# Altium PCB 2layer.PcbDoc (part 1 of 2)
Units mm, origin at the board's own origin, x right, y up, seen from the top; angles counter-clockwise.
Board outline 95.88 x 80.26 mm, 2 copper layers (Top Layer, Bottom Layer); 72 components, 60 nets, 280 pads, 229 vias.
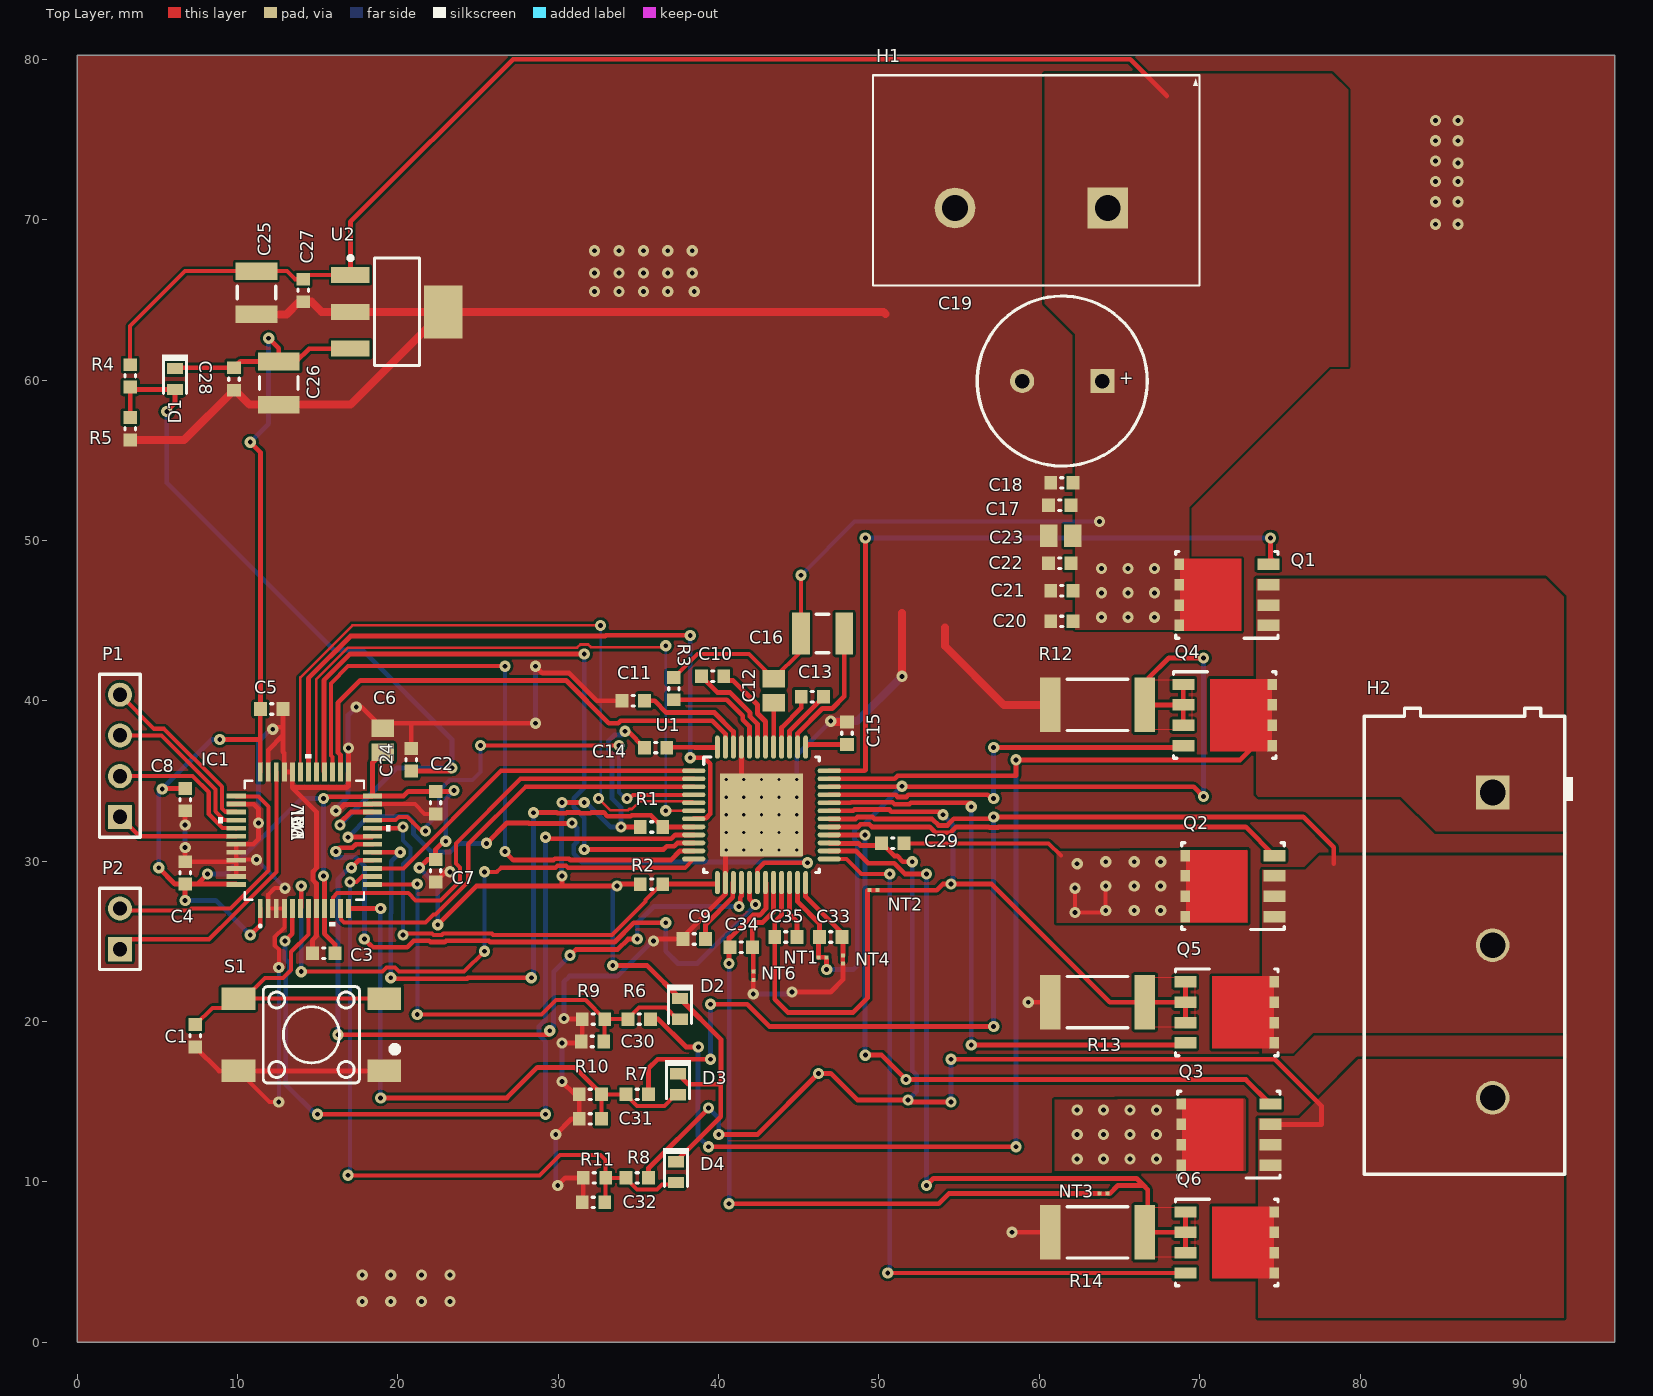
[diagram p0: Top Layer view]
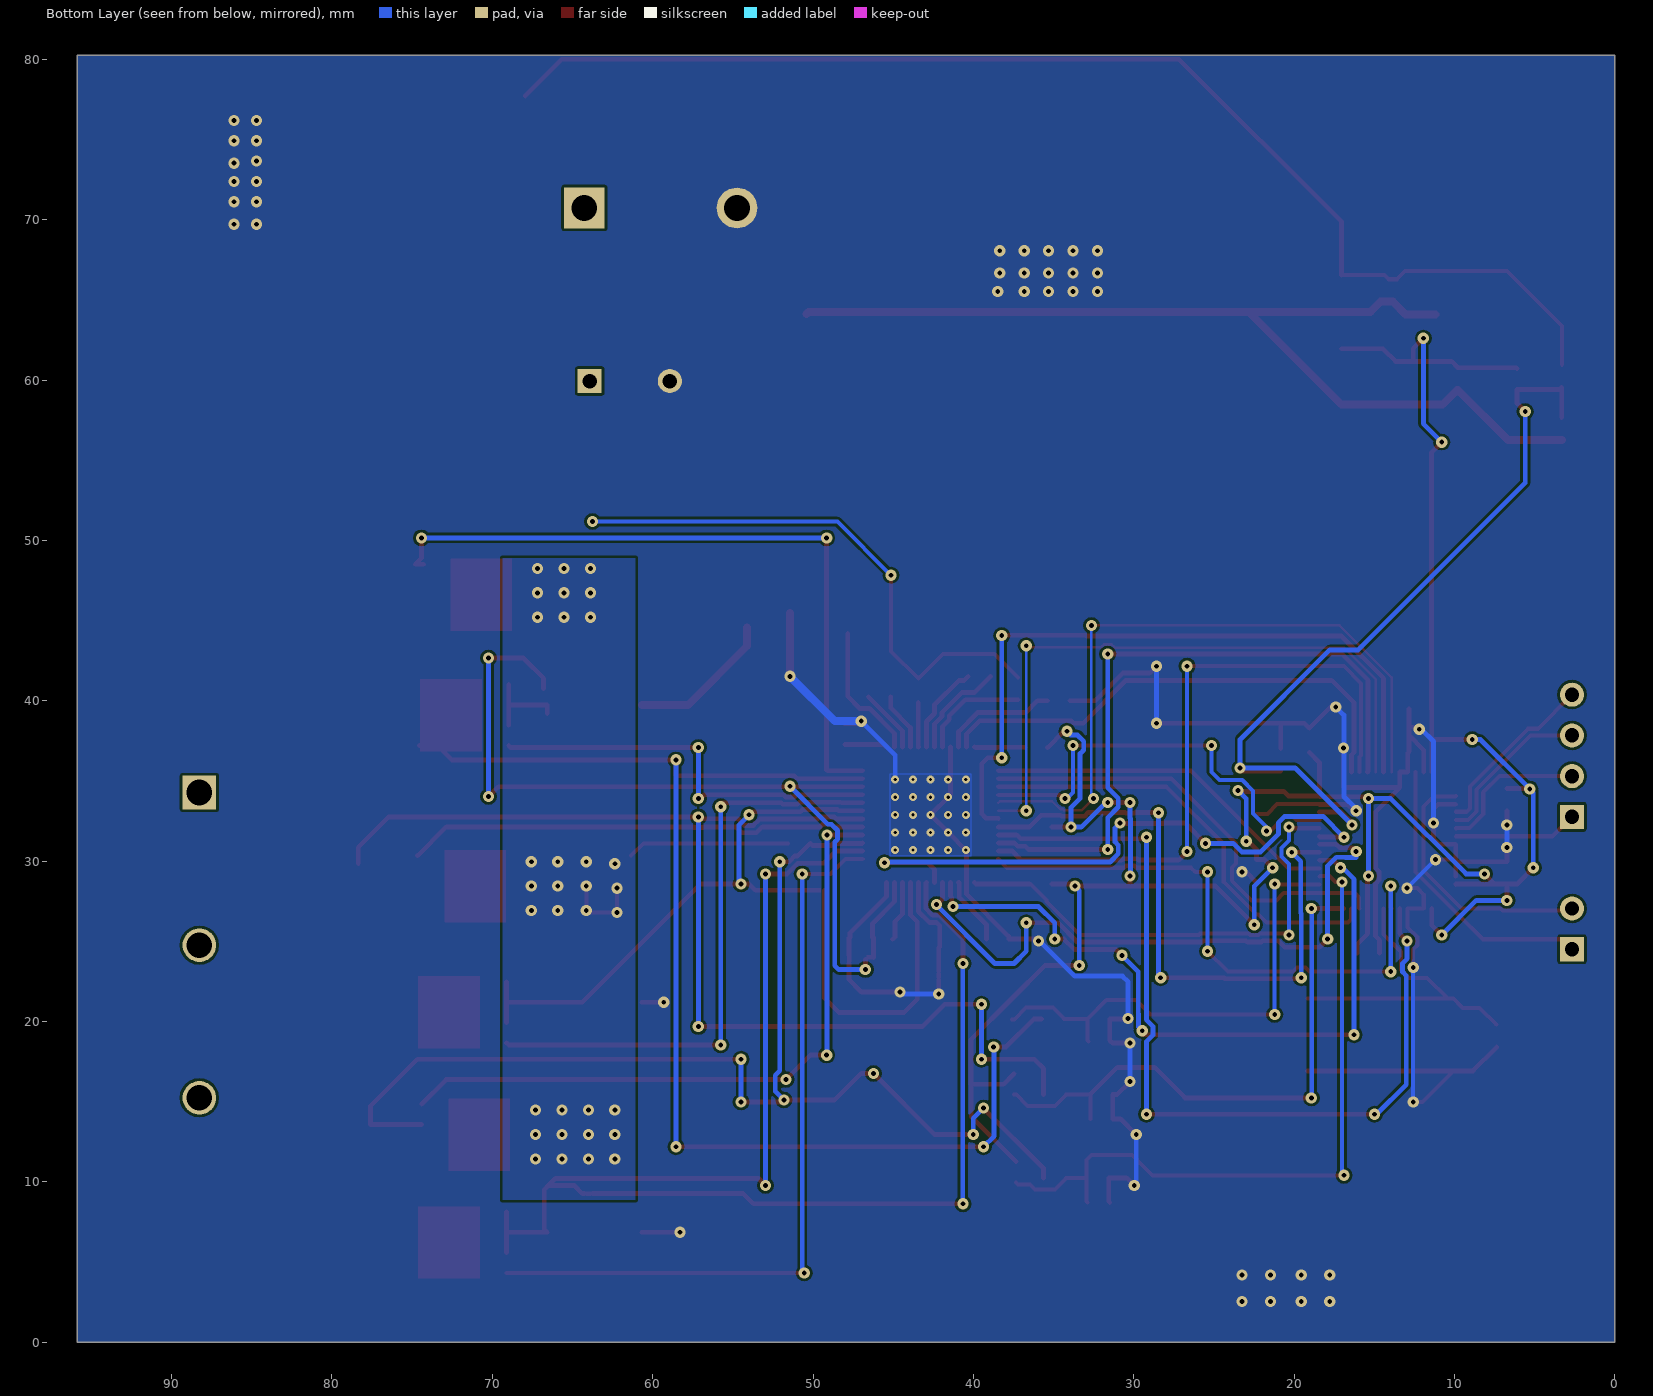
[diagram p1: Bottom Layer view, seen from below]

## Layer stack, top to bottom
Top Solder: solder mask 0.0102, Solder Resist, Dk 3.5
Top Layer: signal copper 0.0356
Dielectric 1: dielectric 0.32, FR-4, Dk 4.8
Bottom Layer: signal copper 0.0356
Bottom Solder: solder mask 0.0102, Solder Resist, Dk 3.5

## Board outline
0,0 95.885,0 95.885,80.264 0,80.264

## Design rules (kind name [scope] priority, off if disabled: settings)
Clearance [All] p1: gap=0.16 ignorepadtopadclearanceinfootprint=FALSE except(0: Arc-Hole Track-Hole SMDPad-Hole THPad-Hole Via-Hole Fill-Hole Poly-Hole Region-Hole Text-Hole)
HoleSize [All] p1: absolutevalues=TRUE maxlimit=2.54 minlimit=0.3 maxpercent=80.000 minpercent=20.000
HoleToHoleClearance [All] p1: gap=0.16 allowstackedmicrovias=TRUE
MinimumSolderMaskSliver [All] p1: minsoldermaskwidth=0.16
PlaneConnect [All] p1: planeconnectstyle=Relief reliefexpansion=0.508 reliefentries=2 reliefconductorwidth=0.254 reliefairgap=0.254
PolygonConnect "Direct Connect" [All] p1: connectstyle=Direct reliefconductorwidth=0.254 reliefentries=4 polygonreliefangle="90 Angle" airgapwidth=0.254
PolygonConnect [All] p2: connectstyle=Relief reliefconductorwidth=0.254 reliefentries=4 polygonreliefangle="90 Angle" airgapwidth=0.254
RoutingVias [All] p1: holewidth=0.3 width=0.7 viastyle="Through Hole" minholewidth=0.3 minwidth=0.5 maxholewidth=0.5 maxwidth=1.27
SilkToSilkClearance [All] p1: silktosilkclearance=0.16
SilkToSolderMaskClearance [IsPad] p1: minsilkscreentomaskgap=0.16 clearancetoexposedcopper=TRUE
SolderMaskExpansion [All] p1: expansion=0.102
UnRoutedNet [All] p1: checkbadconnections=TRUE
UnpouredPolygon [All] p1: allowunpoured=TRUE allowshelved=TRUE
Width [All] p1: maxlimit=11 minlimit=0.16 preferedwidth=0.254
22 further rules are at their usual default settings.

## Classes and differential pairs
component class Designator: C17 C18 C19 C20 C21 C22 C23 C24 C25 C26 C27 C28 D1 H1 R4 R5 U2
component class "Driver Stage": C29 C30 C31 C32 C33 C34 C35 D2 D3 D4 H2 NT1 NT2 NT3 NT4 NT6 Q1 Q2 Q3 Q4 Q5 Q6 R6 R7 R8 R9 R10 R11 R12 R13 R14
component class MCU: C1 C2 C3 C4 C5 C6 C7 C8 IC1 P1 P2 S1

## Components (designator, comment, footprint, x,y, rotation, side; value= is the part's Value field where it differs from the comment)
C1 "C1608X7R1H104K" 0603L 7.366,19.112 r270 top value=0.1uF
C2 "C1608X7R1H104K" 0603L 22.352,33.655 r270 top value=0.1uF
C3 "C1608X7R1H104K" 0603L 15.367,24.257 r180 top value=0.1uF
C4 "C1608X7R1H104K" 0603L 6.731,29.272 r90 top value=0.1uF
C5 "C1608X7R1H104K" 0603L 12.127,39.497 r0 top value=0.1uF
C6 "GRM21BR71A475KA73L" 0805L 19.05,37.539 r90 top value=4.7uF
C7 "C1608X8R1H103K" 0603L 22.352,29.399 r270 top value=0.01uF
C8 "C1608X7R1C105K" 0603L 6.731,33.844 r270 top value=1uF
C9 "C1608X7R1C105K" 0603L 38.481,25.146 r180 top value=1uF
C10 "C1608X7R1H473K" 0603L 39.624,41.529 r180 top value=0.047uF
C11 "C1608X7R1C105K" 0603L 34.671,40.005 r180 top value=1uF
C12 "GRM21BR71A475KA73L" 0805L 43.434,40.64 r90 top value=4.7uF
C13 "C1608X7R1H473K" 0603L 45.847,40.259 r0 top value=0.047uF
C14 "C1608X7R1C105K" 0603L 36.068,37.084 r0 top value=1uF
C15 "C1608X7R1C105K" 0603L 48.006,37.973 r90 top value=1uF
C16 "GRM32ER72A225KA35L" 1210L 46.482,44.196 r180 top value=2.2uF
C17 "C1608X7R1H104K" 0603L 61.279,52.197 r180 top value=0.1uF
C18 "C1608X7R1H103K" 0603L 61.406,53.594 r180 top value=0.01uF
C19 "ECA-1HM471" M_1000x2000 61.428,59.944 r180 top value=470uF
C20 "C1608X7R1H102K" 0603L 61.406,44.958 r180 top value=1000pF
C21 "C1608X7R1H103K" 0603L 61.406,46.863 r180 top value=0.01uF
C22 "C1608X7R1H104K" 0603L 61.279,48.578 r180 top value=0.1uF
C23 "GRM21BR71H105KA12L" 0805L 61.329,50.292 r180 top value=1uF
C24 "C0603C104J4RACTU" 0603L 20.828,36.322 r90 top value=0.1uF
C25 "GRM32ER71H106KA12L" 1210L 11.176,65.452 r270 top value=10uF
C26 "GRM32ER71H106KA12L" 1210L 12.573,59.817 r270 top value=10uF
C27 "C1608X7R1H104K" 0603L 14.097,65.594 r270 top value=0.1uF
C28 "C1608X7R1H104K" 0603L 9.779,60.071 r270 top value=0.1uF
C29 "GRM188R72A182KA01D" 0603L 50.865,31.115 r180 top value=1800pF
C30 "C0603C104J4RACTU" 0603L 32.131,18.759 r180 top value=0.1uF
C31 "C0603C104J4RACTU" 0603L 32.004,13.933 r180 top value=0.1uF
C32 "C0603C104J4RACTU" 0603L 32.193,8.726 r180 top value=0.1uF
C33 "GRM188R71C102KA01D" 0603L 46.99,25.273 r0 top value=1000pF
C34 "GRM188R71C102KA01D" 0603L 41.402,24.638 r0 top value=1000pF
C35 "GRM188R71C102KA01D" 0603L 44.196,25.273 r0 top value=1000pF
D1 "CD0603-B0130L" Diode_0603 6.096,60.071 r270 top value=35V
D2 "CD0603-B0130L" Diode_0603 37.592,20.791 r270 top value=35V
D3 "CD0603-B0130L" Diode_0603 37.465,16.092 r270 top value=35V
D4 "CD0603-B0130L" Diode_0603 37.338,10.616 r270 top value=35V
H1 "OSTT7022150" TERM_BLK_OSTT7022150 64.262,70.739 r180 top
H2 "OSTT7032150" On-Shore_OSTT7032150 88.265,24.765 r270 top
IC1 "STM32F301C6" LQFP48-7x7mm 14.165,31.308 r90 top
NT1 "Net-Tie" Net-Tie_10mil 46.482,24.003 r0 top net-tie
NT2 "Net-Tie" Net-Tie_10mil 49.657,28.194 r0 top net-tie
NT3 "Net-Tie" Net-Tie_10mil 64.008,9.271 r0 top net-tie
NT4 "Net-Tie" Net-Tie_10mil 47.752,23.876 r270 top net-tie
NT6 "Net-Tie" Net-Tie_10mil 42.164,22.86 r270 top net-tie
P1 "" HDR1X4 2.667,32.766 r90 top
P2 "" HDR1X2 2.667,24.511 r90 top
Q1 "CSD18540Q5B" TRANS_NexFET_Q5B 71.501,46.609 r180 top value=60V
Q2 "CSD18540Q5B" TRANS_NexFET_Q5B 71.882,28.448 r180 top value=60V
Q3 "CSD18540Q5B" TRANS_NexFET_Q5B 71.628,12.954 r180 top value=60V
Q4 "CSD18540Q5B" TRANS_NexFET_Q5B 71.755,39.116 r0 top value=60V
Q5 "CSD18540Q5B" TRANS_NexFET_Q5B 71.882,20.574 r0 top value=60V
Q6 "CSD18540Q5B" TRANS_NexFET_Q5B 71.882,6.223 r0 top value=60V
R1 "CRCW060310K0JNEA" 0603L 35.814,32.131 r180 top value=10k
R2 "CRCW060310K0JNEA" 0603L 35.814,28.575 r180 top value=10k
R3 "CRCW0603100RJNEA" 0603L 37.211,40.767 r90 top value=100
R4 "RC0603FR-0762KL" 0603L 3.302,60.263 r90 top value=62.0k
R5 "CRCW06034K99FKEA" 0603L 3.302,56.961 r90 top value=4.99k
R6 "RC0603FR-0762KL" 0603L 35.052,20.156 r0 top value=62.0k
R7 "RC0603FR-0762KL" 0603L 34.925,15.457 r0 top value=62.0k
R8 "RC0603FR-0762KL" 0603L 34.925,10.25 r0 top value=62.0k
R9 "CRCW06034K99FKEA" 0603L 32.193,20.156 r0 top value=4.99k
R10 "CRCW06034K99FKEA" 0603L 32.004,15.457 r0 top value=4.99k
R11 "CRCW06034K99FKEA" 0603L 32.258,10.25 r0 top value=4.99k
R12 "LRMAP2512-R005FT4" 2512 63.627,39.751 r0 top value=0.005
R13 "LRMAP2512-R005FT4" 2512 63.627,21.209 r0 top value=0.005
R14 "LRMAP2512-R005FT4" 2512 63.627,6.858 r0 top value=0.005
S1 "4-1437565-1" SW_FSM4JSMA 14.605,19.177 r270 top
U1 "DRV8305NEPHPRQ1" PHP0048G_N 42.672,32.893 r0 top
U2 "TPS7B6933QDCYRQ1" DCY0004A_N 19.939,64.262 r0 top

## Footprints (in the part's own frame and the unit in brackets; to place one, negate y for a bottom-side part, rotate by r counter-clockwise, add the part's x,y. Pads: shape width x height; smd on the part's side, far side on the other; paste and mask are expansions set on the pad)
0603L [mm]
  rect 0.8x0.85 smd: 1(-0.7,0) 2(0.7,0)
  silkscreen extent -0.07,-0.33 0.07,0.33, body extent -0.87,-0.47 0.87,0.47, height 0.85
0805L [mm]
  rect 1.1x1.4 smd: 1(-0.75,0) 2(0.75,0)
  body extent -1.1,-0.72 1.1,0.72, height 1.1
1210L [mm]
  rect 1.1x2.6 smd: 1(-1.35,0) 2(1.35,0)
  silkscreen extent -0.4,-1.2 0.4,1.2, body extent -1.7,-1.35 1.7,1.35, height 1.35
2512 [mm]
  rect 1.3x3.4 smd: 1(-2.95,0) 2(2.95,0)
  silkscreen extent -1.9,-1.6 1.9,1.6, body extent -3.22,-1.67 3.22,1.67, height 0.71
DCY0004A_N [mm]
  rect 2.4x1 smd: 1(-2.9,2.3) 2(-2.9,0) 3(-2.9,-2.3)
  rect 2.4x3.3 smd: 4(2.9,0)
  silkscreen extent -3.02,-3.35 1.4,3.47, body extent -3.5,-3.25 3.5,3.25, height 1.62
Diode_0603 [mm]
  rect 0.7x1 smd: 1(-0.65,0) 2(0.65,0)
  silkscreen extent -1.5,-0.8 0.9,0.8, body extent -0.9,-0.5 0.9,0.5, height 0.85
HDR1X2 [mm] "Connector; Header; 2 Position"
  rect 1.5x1.5 hole 0.9: 1(0,0)
  round 1.5 hole 0.9: 2(2.54,0)
  silkscreen extent -1.27,-1.27 3.81,1.27
HDR1X4 [mm] "Connector; Header; 4 Position"
  rect 1.5x1.5 hole 0.9: 1(0,0)
  round 1.5 hole 0.9: 2(2.54,0) 3(5.08,0) 4(7.62,0)
  silkscreen extent -1.27,-1.27 8.89,1.27
LQFP48-7x7mm [mil]
  rect 47x12 smd: 1(-167.32,108.27) 2(-167.32,88.58) 3(-167.32,68.9) 4(-167.32,49.21) 5(-167.32,29.53) 6(-167.32,9.84) 7(-167.32,-9.84) 8(-167.32,-29.53) 9(-167.32,-49.21) 10(-167.32,-68.9) 11(-167.32,-88.58) 12(-167.32,-108.27) 25(167.32,-108.27) 26(167.32,-88.58) 27(167.32,-68.9) 28(167.32,-49.21) 29(167.32,-29.53) 30(167.32,-9.84) 31(167.32,9.84) 32(167.32,29.53) 33(167.32,49.21) 34(167.32,68.9) 35(167.32,88.58) 36(167.32,108.27)
  rect 12x47 smd: 13(-108.27,-167.32) 14(-88.58,-167.32) 15(-68.9,-167.32) 16(-49.21,-167.32) 17(-29.53,-167.32) 18(-9.84,-167.32) 19(9.84,-167.32) 20(29.53,-167.32) 21(49.21,-167.32) 22(68.9,-167.32) 23(88.58,-167.32) 24(108.27,-167.32) 37(108.27,167.32) 38(88.58,167.32) 39(68.9,167.32) 40(49.21,167.32) 41(29.53,167.32) 42(9.84,167.32) 43(-9.84,167.32) 44(-29.53,167.32) 45(-49.21,167.32) 46(-68.9,167.32) 47(-88.58,167.32) 48(-108.27,167.32)
  silkscreen extent -214,-211 211,211, body extent 0,0 10,10, height 10
M_1000x2000 [mm]
  rect 1.5x1.5 hole 0.9: 1(-2.5,0)
  round 1.5 hole 0.9: 2(2.5,0)
  silkscreen extent -5.3,-5.3 5.3,5.3, body extent -5.21,-5.24 5.24,5.24, height 22.01
Net-Tie_10mil [mil]
  rect 10x10 smd paste-5 mask-5: 1(-10,0) 2(10,0)
  Top Layer region: -6,5 6,5 6,-5 -6,-5
On-Shore_OSTT7032150 [mm]
  rect 2.1x2.1 hole 1.6: 1(-9.52,0)
  round 2.1 hole 1.6: 2(0,0) 3(9.52,0)
  silkscreen extent -14.78,-8 14.28,5, body extent -14.78,-8 14.28,4.5, height 21.5
PHP0048G_N [mm]
  oval 1.45x0.3 smd: 1(-4.225,2.75) 2(-4.225,2.25) 3(-4.225,1.75) 4(-4.225,1.25) 5(-4.225,0.75) 6(-4.225,0.25) 7(-4.225,-0.25) 8(-4.225,-0.75) 9(-4.225,-1.25) 10(-4.225,-1.75) 11(-4.225,-2.25) 12(-4.225,-2.75) 25(4.225,-2.75) 26(4.225,-2.25) 27(4.225,-1.75) 28(4.225,-1.25) 29(4.225,-0.75) 30(4.225,-0.25) 31(4.225,0.25) 32(4.225,0.75) 33(4.225,1.25) 34(4.225,1.75) 35(4.225,2.25) 36(4.225,2.75)
  oval 0.3x1.45 smd: 13(-2.75,-4.225) 14(-2.25,-4.225) 15(-1.75,-4.225) 16(-1.25,-4.225) 17(-0.75,-4.225) 18(-0.25,-4.225) 19(0.25,-4.225) 20(0.75,-4.225) 21(1.25,-4.225) 22(1.75,-4.225) 23(2.25,-4.225) 24(2.75,-4.225) 37(2.75,4.225) 38(2.25,4.225) 39(1.75,4.225) 40(1.25,4.225) 41(0.75,4.225) 42(0.25,4.225) 43(-0.25,4.225) 44(-0.75,4.225) 45(-1.25,4.225) 46(-1.75,4.225) 47(-2.25,4.225) 48(-2.75,4.225)
  rrect2% 5.17x5.17 smd: 49(0,0)
  silkscreen extent -3.6,-3.6 3.6,3.6, body extent -4.51,-4.51 4.51,4.51, height 1.2
SW_FSM4JSMA [mm]
  rect 1.4x2.1 smd: 1(2.25,4.55) 2(2.25,-4.55) 3(-2.25,4.55) 4(-2.25,-4.55)
  silkscreen extent -3,-3 3,5.4, body extent -3,-5 3,5, height 5.1
TERM_BLK_OSTT7022150 [mm]
  rect 2.54x2.54 hole 1.6: 1(0,0)
  round 2.54 hole 1.6: 2(9.525,0)
  silkscreen extent -5.74,-8.28 14.63,4.83, body extent -5.3,-8 14.33,4.5, height 21.6
TRANS_NexFET_Q5B [mm]
  rect 1.372x0.71 smd paste-0.4: 1(-2.776,1.905) 2(-2.776,0.635) 3(-2.776,-0.635) 4(-2.776,-1.905)
  rect 0.59x0.71 smd paste-0.3: 5(2.776,-1.905) 6(2.776,-0.635) 7(2.776,0.635) 8(2.776,1.905)
  Top Layer region: -1.106,-2.26 2.744,-2.26 2.744,2.26 -1.106,2.26
  silkscreen extent -3.39,-2.7 3,2.7, body extent -3.23,-2.55 2.87,2.55, height 1.06

## Part data
C1 C2 C3 C4 C5 C17 C22 C27 C28: "CAP, CERM, 0.1 µF, 50 V, +/- 10%, X7R, 0603", Cap_Case=0603, Manufacturer=TDK, Supplier Part Number 1=445-1314-1-ND, TempCo=X7R, Tolerance_%=10, Value1="0.017 ohm", Value2=50V, ValueDisplayed=0.1µF, AEC Category=Q200, AEC Qualified=?, Cap_F=0.0000001, ComponentLink1Description="Datasheet link", ComponentLink1URL=http://www.tdk.co.jp/tefe02/e412_c.pdf, CompType=Capacitor, ESR_ohm=0.017, LatestRevisionDate=2015-12-04, MountType=SMT, PackageReference=0603, PartNumber=C1608X7R1H104K, Polarized=N, Published=2008-06-19, Publisher="Texas Instruments", RoHS=Y, Supplier 1=Digi-Key, Supplier 2=Farnell, Supplier Part Number 2=1118182, SymbolVersion=2008-07-09, TaMax_C=125, TaMin_C=-55, Technology=Ceramic, U/M=EA, VDC_V=50
C6 C12: "CAP, CERM, 4.7 µF, 10 V, +/- 10%, X7R, 0805", Cap_Case=0805, Manufacturer=MuRata, Supplier Part Number 1=GRM21BR71A475KA73L-ND, TempCo=X7R, Tolerance_%=10, Value1=Unknown, Value2=10V, ValueDisplayed=4.7µF, AEC Category=Q200, AEC Qualified=?, Cap_F=0.0000047, ComponentLink1Description="Datasheet link", ComponentLink1URL=http://search.murata.co.jp/Ceramy/PnsearchViewAction.do?HnOFG=ON&HnNFG=ON&SEL_CNT=50&sLang=en&sKey=GRM21BR71A475KA73L&x=9&y=9&search=startwith, CompType=Capacitor, LatestRevisionDate=2015-12-04, MountType=SMT, PackageReference=0805, PartNumber=GRM21BR71A475KA73L, Polarized=N, Published=2008-06-19, Publisher="Texas Instruments", RoHS=Y, Supplier 1=Digi-Key, Supplier 2=Mouser, Supplier 3=Farnell, Supplier Part Number 2=81-GRM21BR71A475KA73, Supplier Part Number 3=1845769, SymbolVersion=2008-07-09, TaMax_C=125, TaMin_C=-55, Technology=Ceramic, U/M=EA, VDC_V=10
C7: "CAP, CERM, 0.01 µF, 50 V, +/- 10%, X8R, 0603", Cap_Case=0603, Manufacturer=TDK, Supplier Part Number 1=445-2504-1-ND, TempCo=X8R, Tolerance_%=10, Value1="0.051 ohm", Value2=50V, ValueDisplayed=0.01µF, AEC Category=Q200, AEC Qualified=?, Cap_F=0.00000001, ComponentLink1Description="Datasheet link", ComponentLink1URL=http://www.tdk.com/pdf/X8R.pdf, CompType=Capacitor, ESR_ohm=0.051, LatestRevisionDate=2015-12-04, MountType=SMT, PackageReference=0603, PartNumber=C1608X8R1H103K, Polarized=N, Published=2008-06-19, Publisher="Texas Instruments", RoHS=Y, Supplier 1=Digi-Key, Supplier 2=Farnell, Supplier Part Number 2=1844454, SymbolVersion=2008-07-09, TaMax_C=150, TaMin_C=-55, Technology=Ceramic, U/M=EA, VDC_V=50
C8 C9 C11 C14 C15: "CAP, CERM, 1 µF, 16 V, +/- 10%, X7R, 0603", Cap_Case=0603, Manufacturer=TDK, Supplier Part Number 1=445-1604-1-ND, TempCo=X7R, Tolerance_%=10, Value1="0.0057 ohm", Value2=16V, ValueDisplayed=1µF, AEC Category=Q200, AEC Qualified=?, Cap_F=0.000001, ComponentLink1Description="Datasheet link", ComponentLink1URL=http://www.tdk.co.jp/tefe02/e412_c.pdf, CompType=Capacitor, ESR_ohm=0.0057, LatestRevisionDate=2015-12-04, MountType=SMT, PackageReference=0603, PartNumber=C1608X7R1C105K, Polarized=N, Published=2008-06-19, Publisher="Texas Instruments", RoHS=Y, Supplier 1=Digi-Key, Supplier 2=Farnell, Supplier Part Number 2=1907343, SymbolVersion=2008-07-09, TaMax_C=125, TaMin_C=-55, Technology=Ceramic, U/M=EA, VDC_V=16
C10 C13: "CAP, CERM, 0.047 µF, 50 V, +/- 10%, X7R, 0603", Cap_Case=0603, Manufacturer=TDK, Supplier Part Number 1=445-1313-1-ND, TempCo=X7R, Tolerance_%=10, Value1="0.0234 ohm", Value2=50V, ValueDisplayed=0.047µF, AEC Category=Q200, AEC Qualified=?, Cap_F=0.000000047, ComponentLink1Description="Datasheet link", ComponentLink1URL=http://www.tdk.co.jp/tefe02/e412_c.pdf, CompType=Capacitor, ESR_ohm=0.0234, LatestRevisionDate=2015-12-09, MountType=SMT, PackageReference=0603, PartNumber=C1608X7R1H473K, Polarized=N, Published=2008-06-19, Publisher="Texas Instruments", RoHS=Y, Supplier 1=Digi-Key, Supplier 2=Farnell, Supplier Part Number 2=1907317, SymbolVersion=2008-07-09, TaMax_C=125, TaMin_C=-55, Technology=Ceramic, U/M=EA, VDC_V=50
C16: "CAP, CERM, 2.2 µF, 100 V, +/- 10%, X7R, 1210", Cap_Case=1210, Manufacturer=MuRata, Supplier Part Number 1=490-3385-1-ND, TempCo=X7R, Tolerance_%=10, Value1="0.007 ohm", Value2=100V, ValueDisplayed=2.2µF, AEC Category=Q200, AEC Qualified=?, Cap_F=0.0000022, ComponentLink1Description="Datasheet link", ComponentLink1URL=http://search.murata.co.jp/Ceramy/PnsearchViewAction.do?HnOFG=ON&HnNFG=ON&SEL_CNT=50&sLang=en&sKey=GRM32ER72A225KA35L&x=9&y=9&search=startwith, CompType=Capacitor, ESR_ohm=0.007, IRMS_A=4.4, LatestRevisionDate=2015-12-04, MountType=SMT, PackageReference=1210, PartNumber=GRM32ER72A225KA35L, Polarized=N, Published=2008-06-19, Publisher="Texas Instruments", RoHS=Y, Supplier 1=Digi-Key, Supplier 2=Mouser, Supplier 3=Farnell, Supplier Part Number 2=81-GRM32ER72A225KA35, Supplier Part Number 3=1735547, SymbolVersion=2008-07-09, TaMax_C=125, TaMin_C=-55, Technology=Ceramic, U/M=EA, VDC_V=100
C18 C21: "CAP, CERM, 0.01 µF, 50 V, +/- 10%, X7R, 0603", Cap_Case=0603, Manufacturer=TDK, Supplier Part Number 1=445-1311-1-ND, TempCo=X7R, Tolerance_%=10, Value1="0.0539 ohm", Value2=50V, ValueDisplayed=0.01µF, AEC Category=Q200, AEC Qualified=?, Cap_F=0.00000001, ComponentLink1Description="Datasheet link", ComponentLink1URL=http://www.tdk.co.jp/tefe02/e412_c.pdf, CompType=Capacitor, ESR_ohm=0.0539, LatestRevisionDate=2015-12-04, MountType=SMT, PackageReference=0603, PartNumber=C1608X7R1H103K, Polarized=N, Published=2008-06-19, Publisher="Texas Instruments", RoHS=Y, Supplier 1=Digi-Key, Supplier 2=Farnell, Supplier Part Number 2=1907315, SymbolVersion=2008-07-09, TaMax_C=125, TaMin_C=-55, Technology=Ceramic, U/M=EA, VDC_V=50
C19: "CAP, AL, 470 µF, 50 V, +/- 20%, TH", Cap_Case=10x20mm, Manufacturer=Panasonic, Supplier Part Number 1=P5185-ND, Tolerance_%=20, Value1=Unknown, Value2=50V, ValueDisplayed=470µF, AEC Category=Q200, AEC Qualified=?, Cap_F=0.00047, ComponentLink1Description="Datasheet link", ComponentLink1URL=http://industrial.panasonic.com/www-data/pdf/ABA0000/ABA0000CE12.pdf, CompType=Capacitor, IRMS_A=0.65, LatestRevisionDate=2015-12-17, MountType=TH, PackageReference=10x20, PartNumber=ECA-1HM471, Polarized=Y, Publisher="Texas Instruments", RoHS=Y, Series=M, Supplier 1=Digi-Key, Supplier 2=Mouser, Supplier 3=Farnell, Supplier Part Number 2=667-ECA-1HM471, Supplier Part Number 3=9693815, SymbolVersion=2008-07-09, TaMax_C=85, TaMin_C=-40, Technology=AL, U/M=EA, VDC_V=50
C20: "CAP, CERM, 1000 pF, 50 V, +/- 10%, X7R, 0603", Cap_Case=0603, Manufacturer=TDK, Supplier Part Number 1=445-1308-1-ND, TempCo=X7R, Tolerance_%=10, Value1="0.24 ohm", Value2=50V, ValueDisplayed=1000pF, AEC Category=Q200, AEC Qualified=?, Cap_F=0.000000001, ComponentLink1Description="Datasheet link", ComponentLink1URL=http://www.tdk.co.jp/tefe02/e412_c.pdf, CompType=Capacitor, ESR_ohm=0.24, LatestRevisionDate=2015-12-04, MountType=SMT, PackageReference=0603, PartNumber=C1608X7R1H102K, Polarized=N, Published=2008-06-19, Publisher="Texas Instruments", RoHS=Y, Supplier 1=Digi-Key, Supplier 2=Farnell, Supplier Part Number 2=1844239, SymbolVersion=2008-07-09, TaMax_C=125, TaMin_C=-55, Technology=Ceramic, U/M=EA, VDC_V=50
C23: "CAP, CERM, 1 µF, 50 V, +/- 10%, X7R, 0805", Cap_Case=0805, Manufacturer=MuRata, Supplier Part Number 1=490-4736-1-ND, TempCo=X7R, Tolerance_%=10, Value1=Unknown, Value2=50V, ValueDisplayed=1µF, AEC Category=Q200, AEC Qualified=?, Cap_F=0.000001, ComponentLink1Description="Datasheet link", ComponentLink1URL=http://search.murata.co.jp/Ceramy/PnsearchViewAction.do?HnOFG=ON&HnNFG=ON&SEL_CNT=50&sLang=en&sKey=GRM21BR71H105KA12L&x=9&y=9&search=startwith, CompType=Capacitor, LatestRevisionDate=2015-12-04, MountType=SMT, PackageReference=0805, PartNumber=GRM21BR71H105KA12L, Polarized=N, Published=2008-06-19, Publisher="Texas Instruments", RoHS=Y, Supplier 1=Digi-Key, Supplier 2=Mouser, Supplier 3=Farnell, Supplier Part Number 2=81-GRM21BR71H105KA2L, Supplier Part Number 3=1735541, SymbolVersion=2008-07-09, TaMax_C=125, TaMin_C=-55, Technology=Ceramic, U/M=EA, VDC_V=50
C24 C30 C31 C32: "CAP, CERM, 0.1 µF, 16 V, +/- 5%, X7R, 0603", Cap_Case=0603, Manufacturer=Kemet, Supplier Part Number 1=399-1097-1-ND, TempCo=X7R, Tolerance_%=5, Value1=Unknown, Value2=16V, ValueDisplayed=0.1µF, AEC Category=Q200, AEC Qualified=?, Cap_F=0.0000001, ComponentLink1Description="Datasheet link", ComponentLink1URL=http://www.kemet.com/kemet/web/homepage/kechome.nsf/vapubfiles/F3102_Y5V.pdf/$file/F3102_Y5V.pdf, CompType=Capacitor, LatestRevisionDate=2015-12-04, MountType=SMT, PackageReference=0603, PartNumber=C0603C104J4RACTU, Polarized=N, Published=2008-06-19, Publisher="Texas Instruments", RoHS=Y, Supplier 1=Digi-Key, Supplier 2=Mouser, Supplier 3=Farnell, Supplier Part Number 2=80-C0603C104J4R, Supplier Part Number 3=1650834, SymbolVersion=2008-07-09, TaMax_C=125, TaMin_C=-55, Technology=Ceramic, U/M=EA, VDC_V=16
C25 C26: "CAP, CERM, 10 µF, 50 V, +/- 10%, X7R, 1210", Cap_Case=1210, Manufacturer=MuRata, Supplier Part Number 1=490-6544-1-ND, TempCo=X7R, Tolerance_%=10, Value1=Unknown, Value2=50V, ValueDisplayed=10µF, AEC Category=Q200, AEC Qualified=?, Cap_F=0.00001, ComponentLink1Description="Datasheet link", ComponentLink1URL=http://www.murata.com/products/catalog/pdf/c02e.pdf, CompType=Capacitor, LatestRevisionDate=2015-12-04, MountType=SMT, PackageReference=1210, PartNumber=GRM32ER71H106KA12L, Polarized=N, Published=2008-06-19, Publisher="Texas Instruments", RoHS=Y, Supplier 1=Digi-Key, Supplier 2=Mouser, Supplier Part Number 2=81-GRM32ER71H106KA2L, SymbolVersion=2008-07-09, TaMax_C=125, TaMin_C=-55, Technology=Ceramic, U/M=EA, VDC_V=50
C29: "CAP, CERM, 1800 pF, 100 V, +/- 10%, X7R, 0603", Cap_Case=0603, Manufacturer=MuRata, Supplier Part Number 1=490-1477-1-ND, TempCo=X7R, Tolerance_%=10, Value1=Unknown, Value2=100V, ValueDisplayed=1800pF, AEC Category=Q200, AEC Qualified=?, Cap_F=0.0000000018, ComponentLink1Description="Datasheet link", ComponentLink1URL=http://search.murata.co.jp/Ceramy/PnsearchViewAction.do?HnOFG=ON&HnNFG=ON&SEL_CNT=50&sLang=en&sKey=GRM188R72A182KA01D&x=9&y=9&search=startwith, CompType=Capacitor, LatestRevisionDate=2015-12-04, MountType=SMT, PackageReference=0603, PartNumber=GRM188R72A182KA01D, Polarized=N, Published=2008-06-19, Publisher="Texas Instruments", RoHS=Y, Supplier 1=Digi-Key, Supplier 2=Mouser, Supplier Part Number 2=81-GRM188R72A182KA01, SymbolVersion=2008-07-09, TaMax_C=125, TaMin_C=-55, Technology=Ceramic, U/M=EA, VDC_V=100
C33 C34 C35: "CAP, CERM, 1000 pF, 16 V, +/- 10%, X7R, 0603", Cap_Case=0603, Manufacturer=MuRata, Supplier Part Number 1=GRM188R71C102KA01D-ND, TempCo=X7R, Tolerance_%=10, Value1=Unknown, Value2=16V, ValueDisplayed=1000pF, AEC Category=Q200, AEC Qualified=?, Cap_F=0.000000001, ComponentLink1Description="Datasheet link", ComponentLink1URL=http://search.murata.co.jp/Ceramy/PnsearchViewAction.do?HnOFG=ON&HnNFG=ON&SEL_CNT=50&sLang=en&sKey=GRM188R71C102KA01D&x=9&y=9&search=startwith, CompType=Capacitor, LatestRevisionDate=2015-12-04, MountType=SMT, PackageReference=0603, PartNumber=GRM188R71C102KA01D, Polarized=N, Published=2008-06-19, Publisher="Texas Instruments", RoHS=Y, Supplier 1=Digi-Key, Supplier 2=Mouser, Supplier Part Number 2=81-GRM188R71C102KA1D, SymbolVersion=2008-07-09, TaMax_C=125, TaMin_C=-55, Technology=Ceramic, U/M=EA, VDC_V=16
D1 D2 D3 D4: "Diode, Schottky, 35 V, 0.1 A, 0603 Diode", Manufacturer=Bourns, Supplier Part Number 1=652-CD0603-B0130L, Value1=0.1A, Value2=0.44V, AEC Category=Q101, AEC Qualified=?, ComponentLink1Description="Datasheet link", ComponentLink1URL=http://www.bourns.com/pdfs/SBCD0603_1005.pdf, CompType=Diode, Io_A=0.1, LatestRevisionDate=2015-11-30, MountType=SMT, PackageReference="0603 Diode", PartNumber=CD0603-B0130L, Published=2008-06-26, Publisher="Texas Instruments", RoHS=Y, Supplier 1=Mouser, Supplier 2=Farnell, Supplier Part Number 2=7599572, SymbolVersion=2008-12-08, TJmax_C=125, Type=Schottky, U/M=EA, Vf_V=0.44, Vr_V=35
H1: "Terminal Block, 30A, 9.52mm (.375) Pitch, 2-Pos, TH", Manufacturer="On-Shore Technology", Supplier Part Number 1=ED2677-ND, ComponentLink1Description="Datasheet URL", ComponentLink1URL=http://on-shore.com/sites/default/files/manuals/OSTT7XX2150.pdf, CompType=Connector, LatestRevisionDate=2015-12-23, MountType=TH, PackageReference=19.62x21.5x12.5mm, PartNumber=OSTT7022150, Publisher="Texas Instruments", RoHS=Y, Supplier 1=Digi-Key, SymbolCreator=a0412235, SymbolVersion=2013-10-31
H2: "Terminal Block, 3x1, 9.52mm, TH", Color=Green, Manufacturer="On-Shore Technology", Supplier Part Number 1=ED2678-ND, ComponentLink1Description="Datasheet URL", ComponentLink1URL=http://www.on-shore.com/sites/default/files/manuals/OSTT7XX2150.pdf, CompType="Terminal Block", ContactFinish=Brass, Gender=Female, LatestRevisionDate=2015-12-23, MountType=TH, Orientation=Vertical, PackageReference="Terminal Block, 3x1, 9.52mm, TH", PartNumber=OSTT7032150, PinCount=3, Pitch_mm=9.52, Publisher="Texas Instruments", RoHS=Y, Row_Count=1, Supplier 1=Digi-Key, SymbolCreator=a0412235, SymbolVersion=2013-10-03
NT1 NT2 NT3 NT4 NT6: "Single point connection between nets.", LatestRevisionDate=2015-10-18, LatestRevisionNote="Added Alternate PartNumber and Alternate Manufacturer parameters to appropriate components.", MountType=SMT, PackageReference=N/A, Publisher="Texas Instruments", SymbolCreator=codlsc, SymbolVersion=2009-07-01
P1: library part "Header 4", "Header, 4-Pin", LatestRevisionDate=17-Jul-2002, LatestRevisionNote="Re-released for DXP Platform.", Publisher="Altium Limited"
P2: library part "Header 2", "Header, 2-Pin", LatestRevisionDate=17-Jul-2002, LatestRevisionNote="Re-released for DXP Platform.", Publisher="Altium Limited"
Q1 Q2 Q3 Q4 Q5 Q6: "MOSFET, N-CH, 60 V, 28 A, SON 5x6mm", Alternate Manufacturer=None, Manufacturer="Texas Instruments", Value1="0.0033 ohm", Value2="41 nC", AEC Category=Q101, AEC Qualified=N, ChType=N, ComponentLink1Description="Datasheet link", ComponentLink1URL=http://www.ti.com/lit/ds/symlink/csd18540q5b.pdf, CompType=MOSFET, IdsMax_A=28, LatestRevisionDate=2015-12-03, LatestRevisionNote="Added parts.", MountType=SMT, PackageReference="SON 5x6mm", PartNumber=CSD18540Q5B, Published=2008-06-19, Publisher="Texas Instruments", QgTyp_nC=41, Rdson45_ohm=0.0033, RoHS=Y, SymbolVersion=2008-07-09, U/M=EA, VdsMax_V=60, Vgs_V=20
R1 R2: "RES, 10 k, 5%, 0.1 W, 0603", Manufacturer=Vishay-Dale, Power_W=0.1, Supplier Part Number 1=541-10KGCT-ND, TempCo="200 ppm/C", Tolerance_%=5, Value1=5%, Value2=0.1W, Value_Code=10k0, ValueDisplayed=10k, AEC Category=Q200, AEC Qualified=?, ComponentLink1Description="Datasheet link", ComponentLink1URL=http://www.vishay.com/docs/20035/dcrcwe3.pdf, CompType=Resistor, EIA_Code=E24, LatestRevisionDate=2015-11-22, MountType=SMT, PackageReference=0603, PartNumber=CRCW060310K0JNEA, Published=2008-06-26, Publisher="Texas Instruments", Res_ohm=10000, RoHS=Y, Supplier 1=Digi-Key, Supplier 2=Mouser, Supplier 3=Farnell, Supplier Part Number 2=71-CRCW0603J-10K-E3, Supplier Part Number 3=1469749, SymbolVersion=2009-05-29, Technology="Thick Film", U/M=EA, VDC_V=75
R3: "RES, 100, 5%, 0.1 W, 0603", Manufacturer=Vishay-Dale, Power_W=0.1, Supplier Part Number 1=541-100GCT-ND, TempCo="200 ppm/C", Tolerance_%=5, Value1=5%, Value2=0.1W, Value_Code=100R, ValueDisplayed=100, AEC Category=Q200, AEC Qualified=?, ComponentLink1Description="Datasheet link", ComponentLink1URL=http://www.vishay.com/docs/20035/dcrcwe3.pdf, CompType=Resistor, EIA_Code=E24, LatestRevisionDate=2015-11-22, MountType=SMT, PackageReference=0603, PartNumber=CRCW0603100RJNEA, Published=2008-06-26, Publisher="Texas Instruments", Res_ohm=100, RoHS=Y, Supplier 1=Digi-Key, Supplier 2=Mouser, Supplier 3=Farnell, Supplier Part Number 2=71-CRCW0603J-100-E3, Supplier Part Number 3=1514715, SymbolVersion=2009-05-29, Technology="Thick Film", U/M=EA, VDC_V=75
R4 R6 R7 R8: "RES, 62.0 k, 1%, 0.1 W, 0603", Manufacturer="Yageo America", Power_W=0.1, Supplier Part Number 1=311-62.0KHRCT-ND, TempCo="200 ppm/C", Tolerance_%=1, Value1=1%, Value2=0.1W, Value_Code=62k0, ValueDisplayed=62.0k, AEC Category=Q200, AEC Qualified=?, ComponentLink1Description="Datasheet link", ComponentLink1URL=http://www.yageo.com/pdf/Pu-RC0603_51_PbFree_L_2.pdf, CompType=Resistor, LatestRevisionDate=2015-11-22, MountType=SMT, PackageReference=0603, PartNumber=RC0603FR-0762KL, Published=2008-06-26, Publisher="Texas Instruments", Res_ohm=62000, RoHS=Y, Supplier 1=Digi-Key, Supplier 2=Mouser, Supplier Part Number 2=603-RC0603FR-0762KL, SymbolVersion=2009-05-29, Technology="Thick Film", U/M=EA, VDC_V=150
R5 R9 R10 R11: "RES, 4.99 k, 1%, 0.1 W, 0603", Manufacturer=Vishay-Dale, Power_W=0.1, Supplier Part Number 1=541-4.99KHCT-ND, TempCo="100 ppm/C", Tolerance_%=1, Value1=1%, Value2=0.1W, Value_Code=4k99, ValueDisplayed=4.99k, AEC Category=Q200, AEC Qualified=?, ComponentLink1Description="Datasheet link", ComponentLink1URL=http://www.vishay.com/docs/20035/dcrcwe3.pdf, CompType=Resistor, EIA_Code=E96, LatestRevisionDate=2015-11-22, MountType=SMT, PackageReference=0603, PartNumber=CRCW06034K99FKEA, Published=2008-06-26, Publisher="Texas Instruments", Res_ohm=4990, RoHS=Y, Supplier 1=Digi-Key, Supplier 2=Mouser, Supplier 3=Farnell, Supplier Part Number 2=71-CRCW0603-4.99K-E3, Supplier Part Number 3=1652885, SymbolVersion=2009-05-29, Technology="Thick Film", U/M=EA, VDC_V=75
R12 R13 R14: library part PMR100HZPFU5L00, "RES SMD 0.005 OHM 1% 3W 2512", Manufacturer="TT Electronics/Welwyn", Power_W=3, Supplier Part Number 1=985-1558-1-ND, TempCo="100 ppm/C", Tolerance_%=1, Value1=1%, Value2=3W, Value_Code=5L000, ValueDisplayed=0.005, AEC Category=Q200, AEC Qualified=?, ComponentLink1Description="Datasheet link", ComponentLink1URL=http://www.digikey.com/product-detail/en/LRMAP2512-R005FT4/985-1558-1-ND/4021294, CompType=Resistor, LatestRevisionDate=2015-12-18, MountType=SMT, PackageReference=2512, PartNumber=LRMAP2512-R005FT4, Published=2008-06-26, Publisher="Texas Instruments", Res_ohm=0.005, RoHS=Y, Supplier 1=Digi-Key, SymbolVersion=2009-05-29, Technology="Thick Film", U/M=EA
S1: "Switch, Tactile, SPST-NO, 0.05A, 12V, SMT", CurrentRating_mA=50, Manufacturer="TE Connectivity", Supplier Part Number 1=450-1129-ND, Circuit=SPST-NO, ComponentLink1Description="Datasheet URL", ComponentLink1URL=http://www.te.com/commerce/DocumentDelivery/DDEController?Action=showdoc&DocId=Customer+Drawing%7F2-1437565-7%7FU2%7Fpdf%7FEnglish%7FENG_CD_2-1437565-7_U2.pdf%7F4-1437565-1, CompType=Switch, LatestRevisionDate=2015-11-30, MountType=SMT, Orientation="Top Actuated", PackageReference="SW, SPST 6x6 mm", PartNumber=4-1437565-1, PositionCount=1, Publisher="Texas Instruments", RoHS=Y, Supplier 1=Digi-Key, Supplier 2=Mouser, Supplier Part Number 2=506-FSM4JSMA, SwitchFunction=Off-Mom, SymbolCreator=a0412235, SymbolVersion=2013-06-27, VDC_V=12
U1: library part DRV83053EPHPRQ1, "Three Phase Automotive Gate Driver with Three Integrated Current Shunt Amplifiers and Voltage Regulator, PHP0048G", Alternate Manufacturer="Texas Instruments", Alternate PartNumber=DRV8305NEPHPQ1, ComponentLink1Description="Datasheet Link", ComponentLink1URL=https://sps06.itg.ti.com/sites/KMS/crossdivteams/altium/docs/ComponentDatasheets/TI_Q100_3PhPredriver_DRV8305_v9.pdf, CompType=IC, LatestRevisionDate=2015-12-21, Manufacturer="Texas Instruments", MountType=SMT, PackageReference=PHP0048G, PartNumber=DRV8305NEPHPRQ1, Publisher="Texas Instruments", SymbolCreator=Altium, SymbolVersion=2015-02-03, U/M=EA
U2: "High Voltage Ultra Low Iq - Low Drop Out Regulator, DCY0004A", Alternate Manufacturer="Texas Instruments", ComponentLink1Description="Datasheet Link", ComponentLink1URL=http://www.ti.com/lit/ds/symlink/tps7b6933-q1.pdf, CompType=IC, LatestRevisionDate=2015-12-29, Manufacturer="Texas Instruments", MountType=SMT, PackageReference=DCY0004A, PartNumber=TPS7B6933QDCYRQ1, Publisher="Texas Instruments", SymbolCreator=Altium, SymbolVersion=2014-08-05, U/M=EA

## Via types
v1: diameter 0.7, hole 0.3, Top Layer to Bottom Layer, 204 vias
v2: diameter 0.5, hole 0.2, Top Layer to Bottom Layer, 25 vias

## Nets (pads, with @x,y where several pads share a name; then routed paths per layer and width w, separated by ;. In a path a pad name is that pad's centre, name@x,y a point inside that pad or via, vN(x,y) a via of type N, cw(c..) or ccw(c..) an arc to the next point about the centre after c; other vN are vias at no path point)
GND: C1.2 C2.2 C3.2 C4.2 C5.2 C6.2 C7.2 C8.2 C9.2 C11.2 C15.2 C17.2 C18.2 C19.2 C20.2 C21.2 C22.2 C23.2 C24.2 C25.2 C26.2 C27.2 C28.2 C30.2 C31.2 C32.2 H1.2 IC1.2 IC1.3 IC1.4 IC1.8 IC1.23 IC1.25 IC1.32 IC1.33 IC1.35 IC1.38 IC1.43 IC1.44 IC1.45 IC1.46 IC1.47 NT4.2 NT6.2 R5.1 R9.1 R10.1 R11.1 R12.1 R13.1 R14.1 S1.1 S1.2 U1.14 U1.45 U1.49 U2.2 U2.4 | length 261
  Top Layer w0.254: IC1.45 9.956,30.099 v1(11.176,30.099) ; S1.2 11.996,14.986 v1(12.573,14.986) ; v1(12.573,23.368) 12.573,24.499 12.317,24.755 12.317,25.283 12.915,25.881 IC1.4 IC1.3 IC1.2 11.915,27.917 12.319,28.321 v1(12.954,28.321) ; IC1.23 21.052,33.558 21.655,32.955 C2.2
  Top Layer w0.3: v1(6.731,30.861) C4.2 9.829,29.972 IC1.45 ; v1(6.731,32.258) C8.2 ; C1.2 8.851,16.927 S1.2 S1.1 ; IC1.47 IC1.46 IC1.45 ; IC1.38 11.019,33.558 11.303,33.274 v1(11.303,32.385) 11.303,31.369 10.992,31.058 IC1.43 IC1.44 IC1.45 ; IC1.35 11.915,36.934 12.827,37.846 ; v1(12.192,38.227) 12.319,38.354 12.827,38.354 ; C5.2 12.827,38.354 ; C3.2 14.667,25.071 14.915,25.319 IC1.8 14.915,28.602 14.707,28.81 14.707,29.356 14.915,29.564 14.915,33.091 13.415,34.591 ; v1(16.129,33.147) 16.256,33.147 16.637,33.528 18.385,33.528 IC1.23 ; v1(16.915,37.06) IC1.25 16.915,34.695 16.811,34.591 13.415,34.591 ; v1(17.399,39.624) 17.715,39.624 C6.2 19.369,38.608 20.828,38.608 ; C24.2 20.828,38.608 ; C7.2 22.99,29.337 v1(23.241,29.337) ; v1(28.575,38.608) 20.828,38.608 ; v1(28.575,42.164) 29.004,41.735 30.671,41.735 32.401,40.005 C11.2 ; v1(29.845,12.954) 30.824,13.933 C31.2 R10.1 31.025,15.457 v1(30.226,16.256) ; v1(29.972,9.779) 30.443,10.25 R11.1 31.558,8.791 C32.2 ; v1(30.226,18.669) 31.341,18.669 C30.2 31.493,18.821 R9.1 30.39,20.156 v1(30.353,20.193) ; v1(35.941,25.019) 36.068,25.146 C9.2 37.781,25.301 40.422,27.943 U1.14 40.422,30.643 v2(40.472,30.693) v2(41.572,31.793) v2(42.672,32.893) v2(41.572,33.993) 41.422,34.143 U1.45 ; v1(42.164,21.717) NT6.2 ; v1(44.577,21.844) 46.99,21.844 47.752,22.606 NT4.2 ; v1(58.293,6.858) R14.1 ; v1(59.309,21.209) R13.1 ; 12.827,37.846 12.827,38.354 ; 12.827,37.846 12.827,36.83 12.915,36.742 IC1.33 IC1.32 13.415,34.591
  Top Layer w0.5: R5.1 6.669,56.261 C28.2 9.844,59.371 10.748,58.467 C26.2 17.044,58.467 U2.4 ; C25.2 13.048,64.102 13.84,64.894 C27.2 14.608,64.894 15.24,64.262 U2.2 U2.4 ; v1(46.99,38.735) 47.052,38.673 C15.2 ; 50.419,64.135 50.292,64.262 U2.4 ; v1(51.435,41.529) 51.435,45.466 ; 54.102,44.577 54.102,43.434 57.785,39.751 R12.1
  Bottom Layer w0.254: v1(11.176,30.099) v1(12.954,28.321) ; v1(12.573,14.986) v1(12.573,23.368)
  Bottom Layer w0.3: v1(6.731,30.861) v1(6.731,32.258) ; v1(11.303,32.385) 11.303,37.465 12.065,38.227 v1(12.192,38.227) ; v1(16.129,33.147) 16.129,33.274 16.891,34.036 v1@16.891,37.084 ; v1(16.915,37.06) v1@16.891,37.084 ; v1(17.399,39.624) 16.891,39.116 v1@16.891,37.084 ; v1(28.575,38.608) v1(28.575,42.164) ; v1(29.845,12.954) 29.845,9.906 v1(29.972,9.779) ; v1(30.226,16.256) v1(30.226,18.669) ; v1(30.353,20.193) 30.353,22.479 30.709,22.835 33.674,22.835 35.858,25.019 v1(35.941,25.019) ; v1(42.164,21.717) 44.45,21.717 v1(44.577,21.844) ; v2(44.872,35.093) 44.872,36.617 v1(46.99,38.735)
  Bottom Layer w0.5: v1(46.99,38.735) 48.641,38.735 v1(51.435,41.529)
  other v1: 17.78,2.54 19.558,2.54 21.463,2.54 23.241,2.54 17.78,4.191 19.558,4.191 21.463,4.191 23.241,4.191 32.258,65.532 33.782,65.532 35.306,65.532 36.83,65.532 38.481,65.532 32.258,66.675 33.782,66.675 35.306,66.675 36.83,66.675 38.354,66.675 32.258,68.072 33.782,68.072 35.306,68.072 36.83,68.072 38.354,68.072 84.709,69.723 86.106,69.723 84.709,71.12 86.106,71.12 84.709,72.39 86.106,72.39 86.106,73.533 84.709,73.66 84.709,74.93 86.106,74.93 84.709,76.2 86.106,76.2
  other v2: 41.572,30.693 42.672,30.693 43.772,30.693 44.872,30.693 40.472,31.793 42.672,31.793 43.772,31.793 44.872,31.793 40.472,32.893 41.572,32.893 43.772,32.893 44.872,32.893 40.472,33.993 42.672,33.993 43.772,33.993 44.872,33.993 40.472,35.093 41.572,35.093 42.672,35.093 43.772,35.093
MOT_A: H2.1 Q1.1 Q1.2 Q1.3 Q4.5 Q4.6 Q4.7 Q4.8 R6.2 U1.35 | length 82.6
  Top Layer w0.3: R6.2 36.232,20.156 37.973,18.415 v1(38.735,18.415) ; v1(39.37,12.192) v1(58.547,12.192) ; U1.35 50.974,35.143 51.162,35.331 58.547,35.331 v1(58.547,36.322) 72.517,36.322 73.406,37.211 Q4.5
  Bottom Layer w0.3: v1(38.735,18.415) 38.71,18.39 38.71,12.852 v1(39.37,12.192) ; v1(58.547,12.192) v1(58.547,36.322)
MOT_B: H2.2 Q2.1 Q2.2 Q2.3 Q5.5 Q5.6 Q5.7 Q5.8 R7.2 U1.30 | length 74.2
  Top Layer w0.3: R7.2 35.625,17.083 36.195,17.653 v1(39.497,17.653) ; v1(39.497,21.082) 41.783,21.082 43.18,19.685 v1(57.15,19.685) ; U1.30 46.909,32.631 48.533,32.631 48.665,32.763 49.593,32.763 49.725,32.631 53.319,32.631 53.717,32.233 54.263,32.233 54.673,32.643 v1@57.15,32.643 ; v1(57.15,32.766) 76.454,32.766 78.359,30.861 78.359,29.845
  Bottom Layer w0.3: v1(39.497,17.653) v1(39.497,21.082) ; v1(57.15,19.685) v1(57.15,32.766)
MOT_C: C29.2 H2.3 Q3.1 Q3.2 Q3.3 Q6.5 Q6.6 Q6.7 Q6.8 R8.2 U1.27 | length 76.9
  Top Layer w0.3: R8.2 35.625,10.86 v1(39.37,14.605) ; v1(40.005,12.954) 42.418,12.954 v1(46.228,16.764) 46.99,16.764 48.641,15.113 v1(51.816,15.113) 51.943,14.986 v1(54.483,14.986) ; U1.27 46.925,31.115 48.724,31.115 48.856,30.983 50.033,30.983 C29.2 50.95,30.33 51.137,30.33 51.495,29.972 v1(52.07,29.972) ; v1(54.483,17.653) 74.676,17.653 77.597,14.732 77.597,13.589 Q3.3
  Bottom Layer w0.3: v1(39.37,14.605) 40.005,13.97 v1(40.005,12.954) ; v1(51.816,15.113) 52.349,15.646 52.349,16.656 52.07,16.935 v1(52.07,29.972) ; v1(54.483,14.986) v1(54.483,17.653)
NetC9_1: C9.1 U1.15 | length 4.3
  Top Layer w0.3: C9.1 39.181,26.051 40.882,27.752 40.882,28.668 U1.15
NetC10_1: C10.1 U1.42 | length 5.7
  Top Layer w0.3: C10.1 40.578,41.275 40.894,41.275 42.424,39.745 42.424,39.212 42.922,38.714 U1.42
NetC10_2: C10.2 U1.43 | length 6.3
  Top Layer w0.3: C10.2 39.926,40.527 40.701,40.527 41.964,39.264 41.964,39.021 42.422,38.563 U1.43
NetC11_1: C11.1 U1.46 | length 7.3
  Top Layer w0.3: C11.1 36.01,40.005 36.747,39.268 39.742,39.268 40.922,38.088 U1.46
NetC12_1: C12.1 U1.41 | length 2.8
  Top Layer w0.3: U1.41 43.434,37.13 C12.1
NetC13_1: C13.1 U1.40 | length 3.6
  Top Layer w0.3: U1.40 43.922,38.334 45.147,39.559 C13.1
NetC13_2: C13.2 U1.39 | length 4
  Top Layer w0.3: U1.39 44.422,38.134 C13.2
NetC14_2: C14.2 U1.48 | length 3.2
  Top Layer w0.3: C14.2 36.793,37.109 38.5,37.109 38.525,37.084 39.888,37.084 U1.48
NetC15_1: C15.1 U1.37 | length 2.6
  Top Layer w0.3: U1.37 45.577,37.273 C15.1
NetC16_1: C16.1 U1.38 | length 8.6
  Top Layer w0.3: U1.38 44.922,37.983 46.463,39.524 47.075,39.524 47.832,40.281 C16.1
NetC30_1: C30.1 D2.2 IC1.13 R6.1 R9.2 | length 30.2
  Top Layer w0.254: IC1.13 21.192,28.558 v1(21.209,28.575) ; v1(21.209,20.447) 28.956,20.447 29.845,21.336 31.713,21.336 R9.2 ; C30.1 32.893,18.821 R9.2 ; D2.2 37.442,20.141 36.715,20.868 35.039,20.868 34.352,20.181 R6.1 R9.2
  Bottom Layer w0.254: v1(21.209,20.447) v1(21.209,28.575)
NetC31_1: C31.1 D3.2 IC1.12 R7.1 R10.2 | length 36
  Top Layer w0.254: C31.1 R10.2 R7.1 34.225,15.432 34.912,14.745 36.618,14.745 37.315,15.442 D3.2
  Top Layer w0.3: IC1.12 18.916,27.058 v1(18.923,27.051) ; v1(18.923,15.24) 26.797,15.24 28.702,17.145 31.016,17.145 R10.2
  Bottom Layer w0.3: v1(18.923,15.24) 18.898,15.265 18.898,27.026 v1(18.923,27.051)
NetC32_1: C32.1 D4.2 IC1.14 R8.1 R11.2 | length 44.2
  Top Layer w0.254: v1(16.891,10.414) 28.829,10.414 30.099,11.684 32.639,11.684 32.958,11.365 R11.2 ; v1(17.018,28.702) 17.404,28.702 17.785,29.083 18.39,29.083 IC1.14 ; C32.1 32.958,8.791 R11.2 ; D4.2 37.223,9.851 36.457,9.851 36.144,9.538 34.912,9.538 34.225,10.225 R8.1 R11.2
  Bottom Layer w0.254: v1(16.891,10.414) 17.018,10.541 v1(17.018,28.702)
NetC33_1: C33.1 NT1.1 U1.23 | length 5.3
  Top Layer w0.3: U1.23 44.922,27.468 46.29,26.1 C33.1 46.228,25.211 NT1.1
NetC33_2: C33.2 NT4.1 U1.24 | length 5.5
  Top Layer w0.3: U1.24 45.422,27.795 47.69,25.527 C33.2 47.752,25.211 NT4.1
NetC34_1: C34.1 NT3.1 U1.19 | length 44.7
  Top Layer w0.3: v1(40.64,8.636) 53.721,8.636 54.356,9.271 NT3.1 ; v1(40.64,23.622) 40.64,25.211 40.702,25.273 40.751,25.273 42.123,26.645 42.564,26.645 42.951,27.032 42.951,28.639 U1.19
  Bottom Layer w0.3: v1(40.64,8.636) 40.665,8.661 40.665,23.597 v1(40.64,23.622)
NetC34_2: C34.2 NT6.1 U1.20 | length 6.4
  Top Layer w0.3: NT6.1 42.164,24.592 42.102,24.654 42.102,25.973 42.314,26.185 42.755,26.185 43.422,26.852 U1.20
NetC35_1: C35.1 NT2.1 U1.21 | length 20.7
  Top Layer w0.3: U1.21 43.922,26.65 43.496,26.224 C35.1 43.496,21.401 44.323,20.574 48.387,20.574 49.276,21.463 NT2.1@49.276,28.194
NetC35_2: C35.2 U1.22 | length 3.8
  Top Layer w0.3: U1.22@44.435,28.681 U1.22 44.422,26.698 44.896,26.224 C35.2 C35.2@45.039,25.13
NetIC1_5: IC1.5 U1.9 | length 55.3
  Top Layer w0.3: v1(12.954,25.019) 13.415,25.48 IC1.5 ; v1(14.986,14.224) v1(29.21,14.224) ; v1(29.21,31.496) 29.31,31.396 37.042,31.396 37.289,31.643 U1.9
  Bottom Layer w0.3: v1(12.954,25.019) 12.954,23.92 13.233,23.641 13.233,23.095 13.01,22.872 13.01,16.073 14.859,14.224 v1(14.986,14.224) ; v1(29.21,14.224) 29.21,18.752 28.804,19.158 28.804,19.704 29.21,20.11 v1(29.21,31.496)
NetIC1_6: IC1.6 U1.12 | length 37.4
  Top Layer w0.254: IC1.6 13.97,27.113 v1(13.97,28.448) ; v1(13.97,23.114) 19.038,23.114 19.294,23.37 19.822,23.37 20.078,23.114 24.13,23.114 v1(25.4,24.384) ; v1(25.4,29.337) 26.162,29.337 26.416,29.591 29.833,29.591 29.962,29.72 30.49,29.72 30.619,29.591 37.895,29.591 U1.12
  Bottom Layer w0.254: v1(13.97,23.114) v1(13.97,28.448) ; v1(25.4,24.384) v1(25.4,29.337)
NetIC1_10: IC1.10 U1.2 | length 28.4
  Top Layer w0.254: IC1.10 15.94,27.083 15.94,27.739 16.214,28.012 20.646,28.012 21.099,27.559 22.656,27.559 23.878,28.781 23.878,29.604 23.624,29.858 23.624,31.117 27.65,35.143 U1.2
NetIC1_11: IC1.11 U1.3 | length 27.7
  Top Layer w0.254: IC1.11 16.44,27.033 16.44,26.377 16.644,26.174 21.717,26.174 22.215,26.672 22.354,26.672 24.384,28.702 24.384,31.059 27.968,34.643 U1.3
NetIC1_15: IC1.15 U1.1 | length 22.6
  Top Layer w0.254: IC1.15 20.354,29.558 26.439,35.643 U1.1
NetIC1_16: IC1.16 U1.16 | length 45
  Top Layer w0.3: v1(16.256,19.177) 29.464,19.177 v1(29.464,19.431) ; v1(17.1,29.591) 17.567,30.058 IC1.16 ; v1(30.734,24.13) 31.107,24.503 33.711,24.503 34.354,25.146 v1(34.925,25.146) ; v1(41.275,27.178) 41.342,27.245 41.342,27.753 41.422,27.833 U1.16
  Bottom Layer w0.3: v1(16.256,19.177) 16.256,28.873 16.974,29.591 v1(17.1,29.591) ; v1(29.464,19.431) 29.693,19.66 29.693,20.466 29.718,20.491 29.718,23.114 v1(30.734,24.13) ; v1(34.925,25.146) 34.925,26.162 35.941,27.178 v1(41.275,27.178)
NetIC1_17: IC1.17 R1.1 U1.8 | length 39.5
  Top Layer w0.3: IC1.17 v1(20.144,30.558) ; v1(19.558,22.733) 19.614,22.677 24.311,22.677 24.367,22.733 v1(28.321,22.733) ; v1(28.448,33.02) 28.473,33.045 29.903,33.045 29.953,32.995 30.499,32.995 30.549,33.045 31.3,33.045 31.35,32.995 32.023,32.995 32.073,33.045 32.824,33.045 33.067,32.802 34.522,32.802 34.586,32.866 35.779,32.866 R1.1 38.435,32.131 U1.8
  Bottom Layer w0.3: v1(19.558,22.733) 19.558,26.753 19.583,26.778 19.583,29.997 v1(20.144,30.558) ; v1(28.321,22.733) 28.448,22.86 v1(28.448,33.02)
NetIC1_18: IC1.18 U1.17 | length 40
  Top Layer w0.3: v1(16.129,30.607) 16.358,30.836 17.164,30.836 17.386,31.058 IC1.18 ; v1(17.907,25.146) 18.415,24.638 20.574,24.638 20.98,25.044 21.951,25.044 22.034,24.961 22.924,24.961 23.007,25.044 25.673,25.044 25.754,24.963 33.52,24.963 34.719,26.162 v1(36.703,26.162) ; U1.17 41.922,27.674 v1(42.291,27.305)
  Bottom Layer w0.3: v1(16.129,30.607) 16.129,30.226 16.802,30.226 16.827,30.251 17.373,30.251 17.907,29.717 v1(17.907,25.146) ; v1(36.703,26.162) 36.703,24.384 37.465,23.622 38.652,23.622 42.291,27.261 v1(42.291,27.305)
NetIC1_19: IC1.19 U1.18 | length 39.3
  Top Layer w0.3: v1(16.891,31.496) 16.915,31.52 18.377,31.52 IC1.19 ; v1(25.527,31.115) 26.797,32.385 28.15,32.385 28.175,32.36 30.836,32.36 v1(30.861,32.385) ; U1.18@42.418,28.672 U1.18 42.422,29.468 42.857,29.903 v1(45.543,29.903)
  Bottom Layer w0.3: v1(16.891,31.496) 18.186,32.791 20.593,32.791 20.98,32.404 20.98,31.681 22.079,30.582 23.26,30.582 23.793,31.115 v1(25.527,31.115) ; v1(30.861,32.385) 31.163,32.083 31.163,31.207 30.963,31.007 30.963,30.461 31.471,29.953 45.593,29.953 v1(45.543,29.903)
NetIC1_20: IC1.20 R2.1 U1.13 | length 30.2
  Top Layer w0.254: IC1.20 20.247,32.058 v1(20.32,32.131) ; v1(20.32,25.4) 20.401,25.481 22.132,25.481 22.215,25.398 22.743,25.398 22.826,25.481 25.854,25.481 25.935,25.4 33.339,25.4 35.431,27.492 35.431,27.569 36.437,28.575 R2.1
  Top Layer w0.3: R2.1 39.829,28.575 U1.13
  Bottom Layer w0.254: v1(20.32,25.4) 20.32,29.833 20.781,30.294 20.781,30.822 20.32,31.283 v1(20.32,32.131)
NetIC1_21: IC1.21 U1.4 | length 27.8
  Top Layer w0.254: IC1.21 19.846,32.558 20.056,32.768 20.584,32.768 20.957,32.395 20.957,32.383 21.463,31.877 v1(21.717,31.877) ; v1(25.146,37.211) v1(33.782,37.211) ; v1(34.29,33.909) 34.417,33.909 34.651,34.143 U1.4
  Bottom Layer w0.254: v1(21.717,31.877) 21.717,32.131 22.55,32.964 22.55,34.373 23.231,35.054 24.64,35.054 25.146,35.56 v1(25.146,37.211) ; v1(33.782,37.211) 33.782,34.29 34.163,33.909 v1(34.29,33.909)
NetIC1_26: IC1.26 U1.47 | length 31.5
  Top Layer w0.3: IC1.26 16.415,36.627 16.255,36.787 16.255,39.877 17.653,41.275 30.48,41.275 33.147,38.608 33.738,38.608 33.89,38.76 39.599,38.76 40.422,37.937 U1.47
NetIC1_27: IC1.27 U1.11 | length 40.8
  Top Layer w0.254: IC1.27 15.915,36.509 15.818,36.606 15.818,41.091 16.891,42.164 v1(26.67,42.164) ; v1(26.67,30.607) v1@26.706,30.643
  Top Layer w0.3: v1(26.67,30.607) 27.203,30.074 29.698,30.074 29.781,30.157 30.671,30.157 30.754,30.074 37.021,30.074 37.591,30.643 U1.11
  Bottom Layer w0.254: v1(26.67,30.607) v1(26.67,42.164)
NetIC1_28: IC1.28 U1.10 | length 42.4
  Top Layer w0.3: IC1.28 15.381,35.592 15.381,41.272 17.035,42.926 v1(31.623,42.926) ; v1(31.623,30.734) 36.56,30.734 36.762,30.936 37.233,30.936 37.44,31.143 U1.10
  Bottom Layer w0.3: v1(31.623,30.734) 31.623,32.722 30.963,33.382 30.963,33.928 31.623,34.588 v1(31.623,42.926)
NetIC1_29: IC1.29 U1.6 | length 40.6
  Top Layer w0.16: IC1.29 14.915,41.358 16.873,43.316 31.179,43.316 31.379,43.516 31.867,43.516 32.031,43.352 36.621,43.352 v1(36.703,43.434) ; v1(36.703,33.147) 36.707,33.143 U1.6
  Bottom Layer w0.16: v1(36.703,33.147) v1(36.703,43.434)
NetIC1_30: IC1.30 U1.7 | length 44.1
  Top Layer w0.3: IC1.30 14.415,41.409 17.05,44.044 32.912,44.044 32.962,44.094 38.202,44.094 v1(38.227,44.069) ; v1(38.227,36.449) 39.103,36.449 39.482,36.07 39.482,32.952 39.213,32.683 38.447,32.683 U1.7
  Bottom Layer w0.3: v1(38.227,36.449) v1(38.227,44.069)
NetIC1_31: IC1.31 U1.5 | length 43.3
  Top Layer w0.16: IC1.31 13.915,41.461 17.158,44.704 v1(32.639,44.704) ; v1(32.512,33.909) 33.229,33.192 34.36,33.192 34.424,33.256 34.598,33.256 35.079,33.737 38.353,33.737 U1.5
  Bottom Layer w0.16: v1(32.512,33.909) 32.639,34.036 v1(32.639,44.704)
NetIC1_39: IC1.39 P1.4 | length 11.1
  Top Layer w0.254: P1.4 4.793,38.26 5.417,38.26 9.031,34.646 9.031,33.287 9.234,33.083 9.89,33.083 IC1.39
NetIC1_40: IC1.40 P1.3 | length 10.2
  Top Layer w0.254: P1.3 5.245,37.846 8.617,34.474 8.617,33.115 9.149,32.583 9.89,32.583 IC1.40
NetIC1_41: IC1.41 P1.2 | length 9.4
  Top Layer w0.254: P1.2 7.2,35.306 8.203,34.303 8.203,32.944 9.063,32.083 9.89,32.083 IC1.41
NetIC1_42: IC1.42 P1.1 | length 7.7
  Top Layer w0.254: P1.1 3.875,31.558 IC1.42
NetNT1_2: NT1.2 Q4.1 Q4.2 Q4.3 R12.2 U1.34 | length 57.5
  Top Layer w0.3: v1(46.736,23.241) NT1.2@46.736,23.876 ; U1.34 v1@51.435,34.643 ; v1(51.435,34.671) 51.463,34.643 69.624,34.643 v1(70.231,34.036) ; R12.2@66.577,39.214 R12.2 Q4.2 ; R12.2@66.802,40.767 66.802,41.402 68.072,42.672 v1(70.231,42.672) ; Q4.3 Q4.2 ; Q4.1 Q4.2
  Bottom Layer w0.3: v1(46.736,23.241) 48.387,23.241 48.641,23.495 48.641,31.198 48.469,31.37 48.469,31.916 48.856,32.303 49.067,32.303 v1(51.435,34.671) ; v1(70.231,34.036) v1(70.231,42.672)
NetNT2_2: NT2.2 Q5.1 Q5.2 Q5.3 R13.2 U1.31 | length 37
  Top Layer w0.3: U1.31 48.395,33.143 48.475,33.223 50.649,33.223 50.781,33.091 53.792,33.091 v1(53.99,32.893) ; NT2.2@49.784,28.194 NT2.2 53.594,28.194 53.975,28.575 v1(54.483,28.575) 57.023,28.575 64.389,21.209 R13.2 Q5.2 ; Q5.3 Q5.2 ; Q5.1 Q5.2
  Bottom Layer w0.3: v1(53.99,32.893) 54.61,32.273 54.61,28.575 v1(54.483,28.575)
NetNT3_2: NT3.2 Q6.1 Q6.2 Q6.3 R14.2 U1.26 | length 50.6
  Top Layer w0.3: U1.26 48.545,30.643 49.318,29.87 50.946,29.87 51.606,29.21 v1(52.959,29.21) ; v1(52.959,9.779) 53.396,10.216 66.065,10.216 66.502,9.779 ; NT3.2 64.389,9.271 64.897,9.779 66.502,9.779 ; Q6.3 Q6.2 ; Q6.1 Q6.2 ; 66.502,9.779 66.756,9.525 66.756,7.037 R14.2 Q6.2
  Bottom Layer w0.3: v1(52.959,9.779) v1(52.959,29.21)
NetQ1_4: Q1.4 U1.36 | length 44.4
  Top Layer w0.3: U1.36 49.105,35.643 49.149,35.687 v1(49.149,50.165) ; Q1.4 74.803,48.514 74.422,48.895 v1(74.422,50.165)
  Bottom Layer w0.3: v1(49.149,50.165) v1(74.422,50.165)
NetQ2_4: Q2.4 U1.29 | length 29
  Top Layer w0.3: U1.29 48.696,32.143 48.856,32.303 49.402,32.303 49.562,32.143 53.156,32.143 53.526,31.773 54.454,31.773 54.824,32.143 56.84,32.143 56.877,32.106 57.423,32.106 57.46,32.143 72.868,32.143 Q2.4
NetQ3_4: Q3.4 U1.28 | length 42.5
  Top Layer w0.3: U1.28 v1(49.129,31.643) ; v1(49.149,17.907) 50.165,17.907 v1(51.689,16.383) 72.88,16.383 Q3.4
  Bottom Layer w0.3: v1(49.129,31.643) 49.129,17.927 v1(49.149,17.907)
NetQ4_4: Q4.4 U1.33 | length 25.5
  Top Layer w0.3: U1.33 51.03,34.143 51.162,34.011 51.708,34.011 51.84,34.143 56.769,34.143 57.003,33.909 v1(57.15,33.909) ; v1(57.15,37.084) 68.852,37.084 Q4.4
  Bottom Layer w0.3: v1(57.15,33.909) v1(57.15,37.084)
NetQ5_4: Q5.4 U1.32 | length 37.5
  Top Layer w0.3: U1.32 48.244,33.643 48.284,33.683 50.839,33.683 50.971,33.551 51.899,33.551 51.991,33.643 55.741,33.643 55.753,33.631 v1(55.753,33.401) ; v1(55.753,18.542) 68.979,18.542 Q5.4
  Bottom Layer w0.3: v1(55.753,18.542) v1(55.753,33.401)
NetQ6_4: Q6.4 U1.25 | length 47.7
  Top Layer w0.254: U1.25 47.962,30.143 48.895,29.21 v1(50.673,29.21) ; v1(50.546,4.318) Q6.4
  Bottom Layer w0.254: v1(50.546,4.318) 50.673,4.445 v1(50.673,29.21)
NetR3_1: R3.1 U1.44 | length 6.8
  Top Layer w0.3: R3.1 40.511,40.067 41.504,39.074 41.504,38.831 41.922,38.413 U1.44
NRST: C1.1 IC1.7 S1.3 S1.4 | length 20.4